# Altium PCB PCB1.PcbDoc
Units mil, origin at the board's own origin, x right, y up, seen from the top; angles counter-clockwise.
Board outline 2920 x 2335 mil, 2 copper layers (Top Layer, Bottom Layer); 13 components, 23 nets, 84 pads, 24 vias.
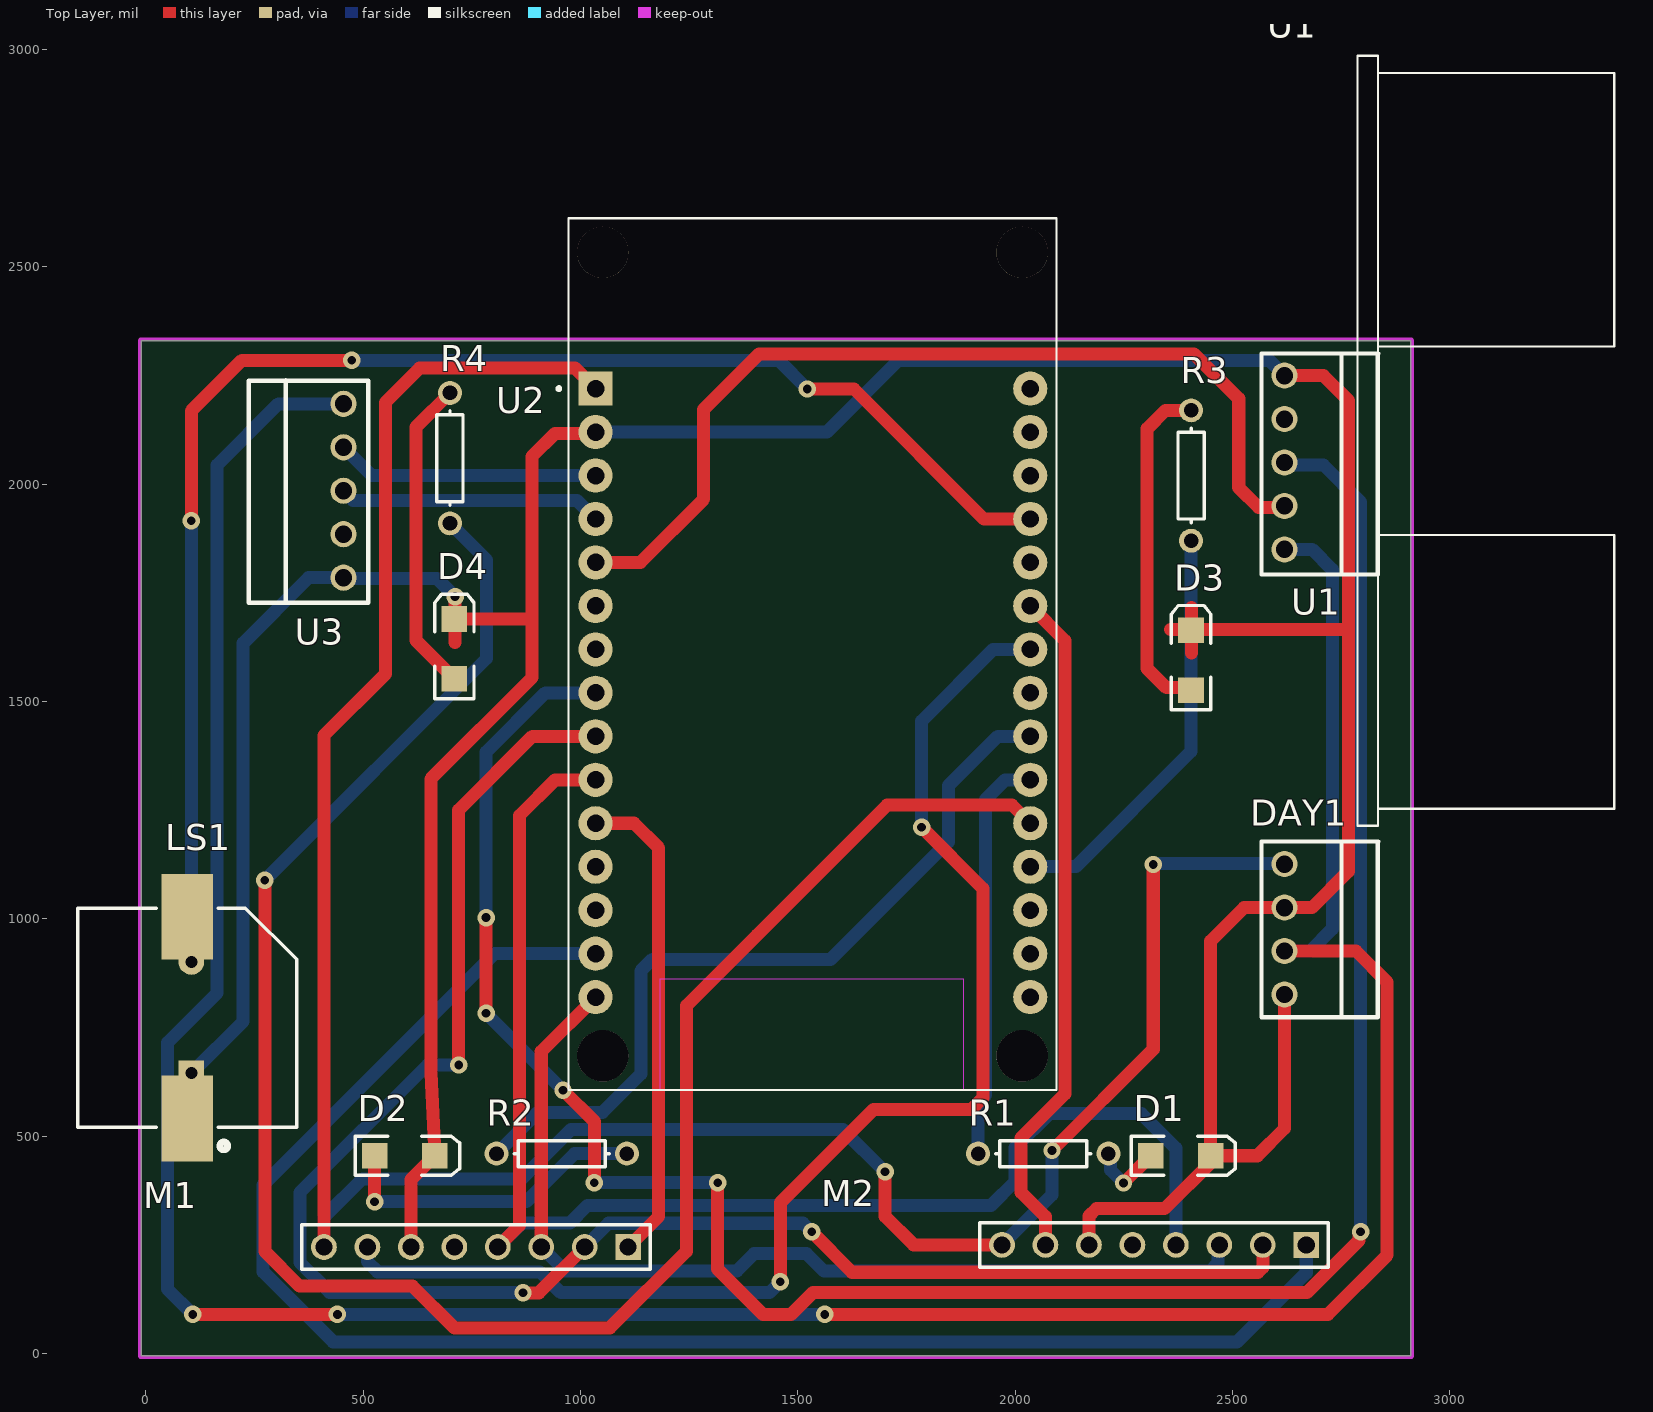
[diagram p0: Top Layer view]
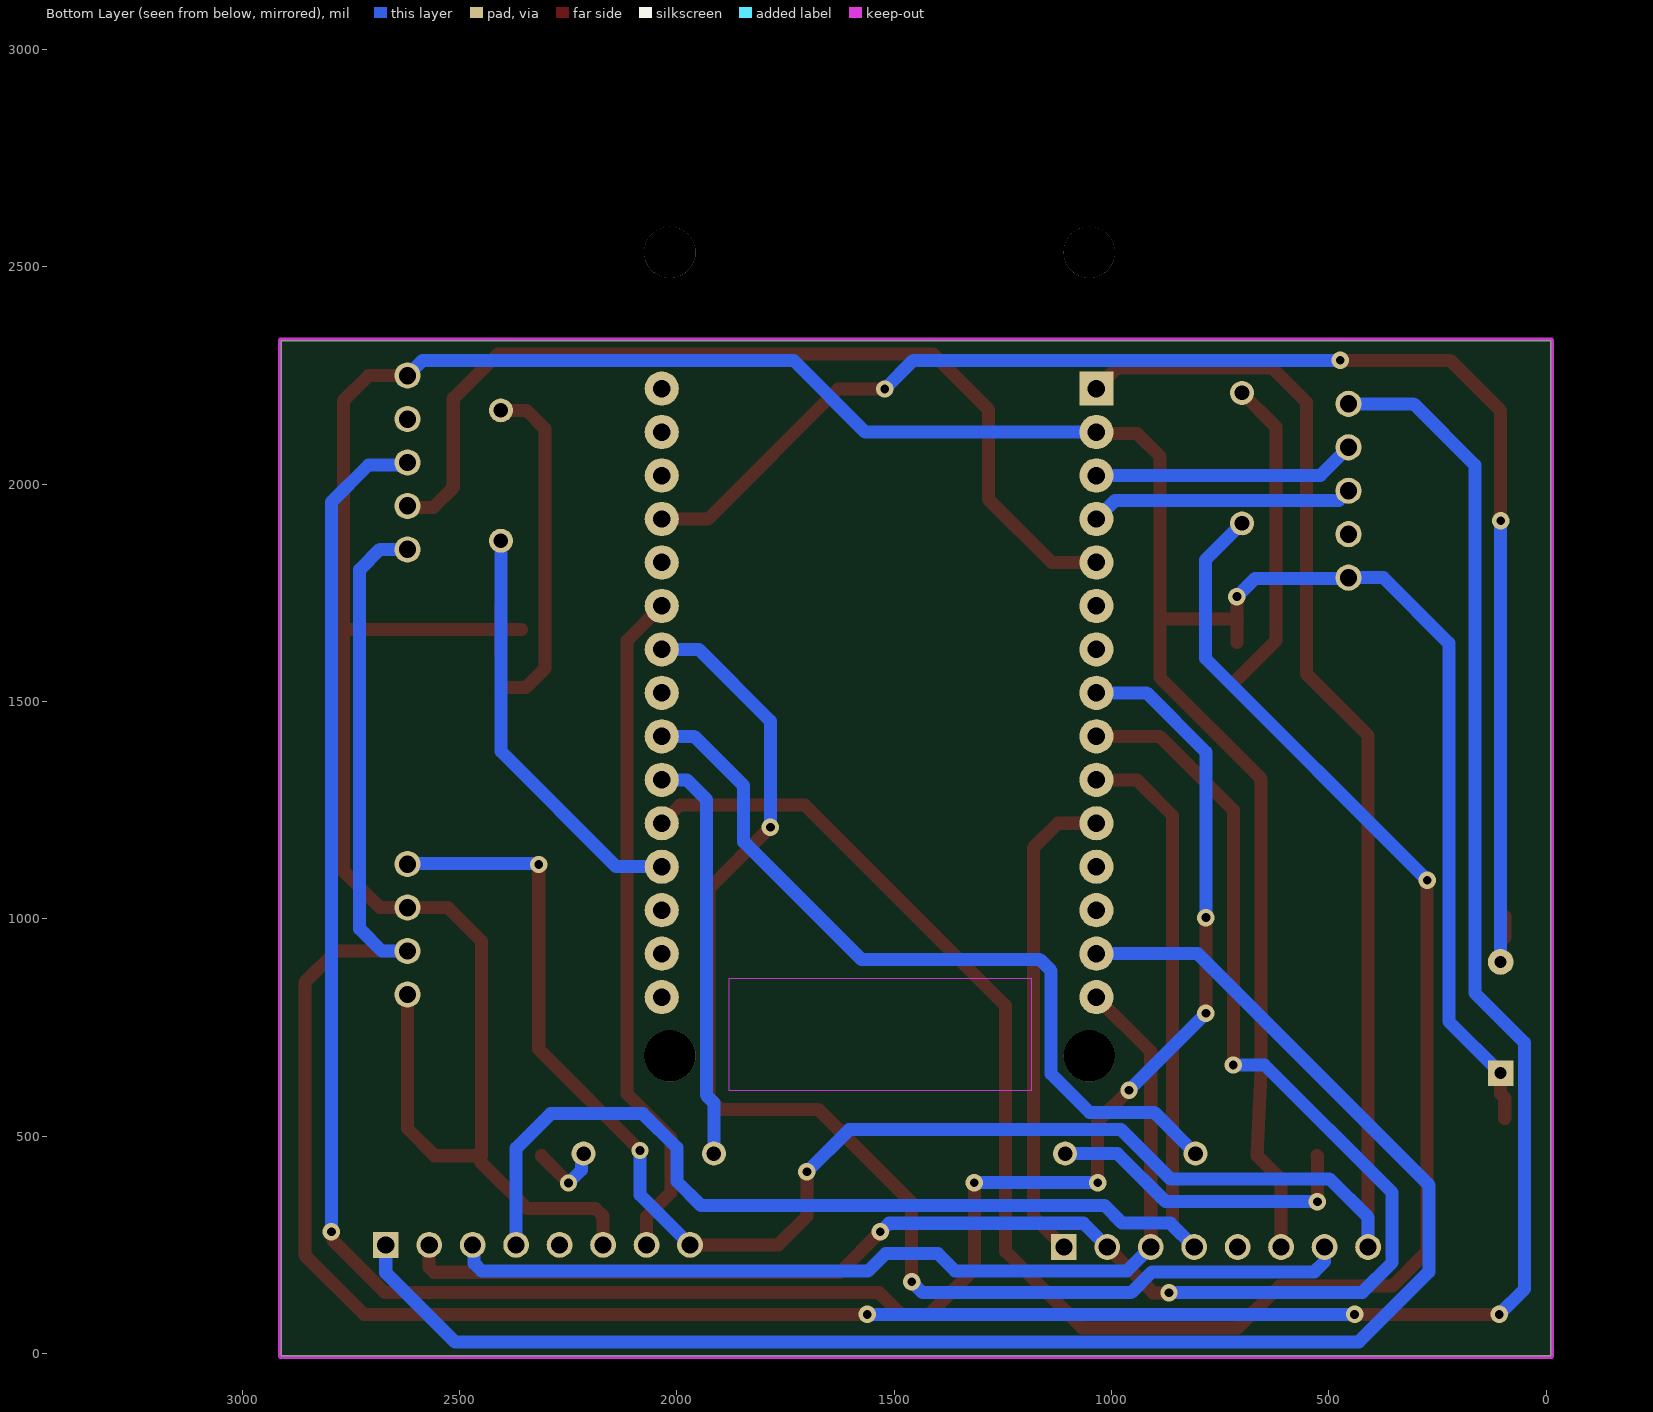
[diagram p1: Bottom Layer view, seen from below]

## Layer stack, top to bottom
Top Solder: solder mask 0.4, Solder Resist, Dk 3.5
Top Layer: signal copper 1.4
Dielectric 1: dielectric 12.6, FR-4, Dk 4.8
Bottom Layer: signal copper 1.4
Bottom Solder: solder mask 0.4, Solder Resist, Dk 3.5

## Board outline
-10,-5 2910,-5 2910,2330 -10,2330

## Design rules (kind name [scope] priority, off if disabled: settings)
Clearance [All] p1: gap=10 ignorepadtopadclearanceinfootprint=FALSE except(0: Arc-Hole Track-Hole SMDPad-Hole THPad-Hole Via-Hole Fill-Hole Poly-Hole Region-Hole Text-Hole; 30: Arc-Fill Arc-Poly Arc-Region Track-Fill Track-Poly Track-Region SMDPad-Fill SMDPad-Poly SMDPad-Region THPad-Fill THPad-Poly THPad-Region Via-Fill Via-Poly Via-Region Fill-Fill Fill-Poly Fill-Region Poly-Poly Poly-Region Region-Region)
PolygonConnect [All] p1: connectstyle=Relief reliefconductorwidth=10 reliefentries=4 polygonreliefangle="90 Angle" airgapwidth=10
RoutingVias [All] p1: holewidth=28 width=50 viastyle="Through Hole" minholewidth=28 minwidth=50 maxholewidth=28 maxwidth=50
SolderMaskExpansion [All] p1: expansion=4 istentingtop=FALSE
Width [All] p1: maxlimit=150 minlimit=28 preferedwidth=30
30 further rules are at their usual default settings.

## Components (designator, comment, footprint, x,y, rotation, side; value= is the part's Value field where it differs from the comment)
D1 "LED2" 3.2X1.6X1.1 2381.1,455 r0 top
D2 "LED2" 3.2X1.6X1.1 596.1,455 r0 top
D3 "LED2" 3.2X1.6X1.1 2405,1595 r90 top
D4 "LED2" 3.2X1.6X1.1 710,1621.1 r90 top
LS1 "Buzzer" ABSM-1574 95.55,540.67 r90 top
M1 "RFID-RC522" RFID-RC522 760,245 r180 top
M2 "RFID-RC522" RFID-RC522 2320,250 r180 top
R1 "Res1" AXIAL-0.3 2065,460 r0 top value=330
R2 "Res1" AXIAL-0.3 957,460 r0 top value=330
R3 "Res1" AXIAL-0.3 2405,2020 r90 top value=330
R4 "Res1" AXIAL-0.3 700,2060 r90 top value=330
U1 "HC-SR04" XCVR_HC-SR04 2620,2100 r90 top
U2 "ESP32-DEVKIT-V1" MODULE_ESP32_DEVKIT_V1 1535,1609.17 r0 top

## Footprints (in the part's own frame and the unit in brackets; to place one, negate y for a bottom-side part, rotate by r counter-clockwise, add the part's x,y. Pads: shape width x height; smd on the part's side, far side on the other; paste and mask are expansions set on the pad)
3.2X1.6X1.1 [mm] "SMT LED; 2 Flat Leads"
  rect 1.5x1.5 smd: 1(-1.75,0) 2(1.75,0)
  silkscreen extent -2.9,-1.15 3.2,1.15
ABSM-1574 [mm] "Magnetic Transducer Buzzer"
  rect 5x3 smd: 1(0,0) 2(11.8,0)
  rect 1.5x1.5 hole 0.7: 1A(2.65,-0.24)
  round 1.5 hole 0.7: 2A(9.15,-0.24)
  silkscreen extent -1.83,-6.4 12.3,6.4
AXIAL-0.3 [mm] "Axial Device, Thru-Hole; 2 Leads; 0.3 in Pin Spacing"
  round 1.4 hole 0.85: 1(-3.81,0) 2(3.81,0)
  silkscreen extent -2.77,-0.76 2.77,0.76
MODULE_ESP32_DEVKIT_V1 [mm]
  rect 2x2 / inner round 2 / far side rect 2x2 hole 1.02: 1(-12.7,15.515)
  round 2 hole 1.02: 2(-12.7,12.975) 3(-12.7,10.435) 4(-12.7,7.895) 5(-12.7,5.355) 6(-12.7,2.815) 7(-12.7,0.275) 8(-12.7,-2.265) 9(-12.7,-4.805) 10(-12.7,-7.345) 11(-12.7,-9.885) 12(-12.7,-12.425) 13(-12.7,-14.965) 14(-12.7,-17.505) 15(-12.7,-20.045) 16(12.7,-20.045) 17(12.7,-17.505) 18(12.7,-14.965) 19(12.7,-12.425) 20(12.7,-9.885) 21(12.7,-7.345) 22(12.7,-4.805) 23(12.7,-2.265) 24(12.7,0.275) 25(12.7,2.815) 26(12.7,5.355) 27(12.7,7.895) 28(12.7,10.435) 29(12.7,12.975) 30(12.7,15.515)
  round 3 hole 3 unplated: ""(-12.28,-23.475) ""(-12.28,23.475) ""(12.23,-23.475) ""(12.23,23.475)
  Keep-Out Layer region: 8.78,-25.475 -8.91,-25.475 -8.91,-18.985 8.78,-18.985
  Keep-Out Layer region: 8.78,-25.475 -8.91,-25.475 -8.91,-18.985 8.78,-18.985
  silkscreen extent -14.95,-25.48 14.23,25.48
RFID-RC522 [mm]
  rect 1.508x1.508 / inner round 1.508 / far side rect 1.508x1.508 hole 1: 1(-8.89,0)
  round 1.508 hole 1: 2(-6.35,0) 3(-3.81,0) 4(-1.27,0) 5(1.27,0) 6(3.81,0) 7(6.35,0) 8(8.89,0)
  silkscreen extent -10.19,-1.3 10.19,1.3
XCVR_HC-SR04 [mm]
  round 1.53 hole 1.02: 1(-3.81,0) 2(-1.27,0) 3(1.27,0) 4(3.81,0)
  silkscreen extent -22.5,-19.27 22.5,-4.27

## Part data
D1 D2 D3 D4: "Typical RED, GREEN, YELLOW, AMBER GaAs LED", LatestRevisionDate=17-Jul-2002, LatestRevisionNote="Re-released for DXP Platform.", PackageDescription="SM LED; 2 Flat Leads", PackageReference=3.2X1.6X1.1, PackageVersion=Feb-2002, Published=8-Jun-2000, Publisher="Altium Limited"
LS1: "Magnetic Transducer Buzzer", ComponentLink1Description="Manufacturer Link", ComponentLink1URL=http://www.megastar.com/linecard/buzzmode/index.php, DatasheetVersion=17-Dec-2003, LatestRevisionDate=17-Dec-2003, LatestRevisionNote="Schematic revised, PCB Footprint replaced.", PackageDescription="Magnetic Transducer Buzzer", PackageReference=ABSM-1574, Published=24-Mar-1999, Publisher="Altium Limited"
M1 M2: "Bá»™ cÃ´ng cá»¥ phÃ¡t triá»ƒn trong IC Ä‘áº§u Ä‘á»c/ghi tÃ­ch há»£p MFRC522 Ä‘á»ƒ liÃªn láº¡c khÃ´ng tiáº¿p xÃºc á»Ÿ táº§n sá»‘ 13,56 MHz.", Package=Package, Check_prices=https://www.snapeda.com/parts/RFID-RC522/Handson+Technology/view-part/?ref=eda, MF="Handson Technology", MP=RFID-RC522, SnapEDA_Link=https://www.snapeda.com/parts/RFID-RC522/Handson+Technology/view-part/?ref=snap
R1 R2 R3 R4: "Resistor", LatestRevisionDate=17-Jul-2002, LatestRevisionNote="Re-released for DXP Platform.", PackageDescription="Axial Device, Thru-Hole; 2 Leads; 0.3 in Pin Spacing", PackageReference=AXIAL-0.3, Published=8-Jun-2000, Publisher="Altium Limited"
U1: "Ultrasonic Sensor Module", Package=None, Availability=Unavailable, MP=HC-SR04, Price=None
U2: "Dual core, Wi-Fi: 2.4 GHz up to 150 Mbits/s,BLE (Bluetooth Low Energy) and legacy Bluetooth, 32 bits, Up to 240 MHz", Package=None, Availability="Not in stock", Check_prices=https://www.snapeda.com/parts/ESP32-DEVKIT-V1/Do+it/view-part/?ref=eda, MF="Do it", MP=ESP32-DEVKIT-V1, Price=None, SnapEDA_Link=https://www.snapeda.com/parts/ESP32-DEVKIT-V1/Do+it/view-part/?ref=snap

## Free pads (board coordinates)
  round 60.24 hole 40.16: 6(455,1785) 6(455,1885) 6(455,1985) 6(455,2085) 6(455,2185) 6(2620,826.06) 6(2620,926.06) 6(2620,1026.06) 6(2620,1126.06) 6(2620,1850)

## Via types
v1: diameter 40, hole 20, Top Layer to Bottom Layer, tented both sides, 24 vias

## Nets (pads, with @x,y where several pads share a name; then routed paths per layer and width w, separated by ;. In a path a pad name is that pad's centre, name@x,y a point inside that pad or via, vN(x,y) a via of type N, cw(c..) or ccw(c..) an arc to the next point about the centre after c; other vN are vias at no path point)
5V: pad.6@455,2185 pad.6@2620,926.06 pad.6@2620,1850 | length 7160.2
  Top Layer w30: v1(108,90) v1(441,90) ; v1(1562,90) 2720,90 2856.3,226.3 2856.3,854.33 2784.57,926.06 pad.6@2620,926.06
  Bottom Layer w30: v1(108,90) 50,148 50,715 164,829 164,2043.92 305.08,2185 pad.6@455,2185 ; v1(441,90) v1(1562,90) ; pad.6@2620,926.06 2679.02,926.06 2730,977.05 2730,1803.46 2683.46,1850 pad.6@2620,1850
Buzzer: LS1.2 LS1.2A U2.27 | length 3505.6
  Top Layer w30: LS1.2 95.55,957.45 105,948 LS1.2A ; v1(105,1916) 105,2168.98 221.02,2285 v1(474,2285) ; v1(1522,2219) 1629.43,2219 1928.43,1920 U2.27
  Bottom Layer w30: LS1.2A v1(105,1916) ; v1(474,2285) 1456,2285 v1(1522,2219)
Echo_1: pad.6@455,1985 U2.4 | length 606.9
  Bottom Layer w30: pad.6@455,1985 477,1963 992,1963 U2.4
Echo_2: U1.2 U2.8 | length 5387.2
  Top Layer w30: v1(783,783) v1(783,1003) ; v1(960,606) 1032,534 v1(1032,393) ; v1(1316,393) 1316,194 1420,90 1485,90 1535,140 2671.5,140 2791.17,259.68 2791.17,276.17 v1(2795,280)
  Bottom Layer w30: v1(783,783) v1(960,606) ; v1(783,1003) 783,1383.39 919.61,1520 U2.8 ; v1(1032,393) v1(1316,393) ; U1.2 2625.71,2044.29 2709.65,2044.29 2795,1958.94 v1(2795,280)
GND: D1.2 D2.2 D3.2 D4.2 LS1.1 LS1.1A M1.6 M2.6 pad.6@455,1785 pad.6@2620,826.06 pad.6@2620,1026.06 U1.4 U2.2 | length 9316.9
  Top Layer w30: LS1.1 95.55,588 105,597.45 LS1.1A ; M1.6 610,400 D2.2 656,646 656,1322.34 888.78,1555.12 888.78,2063.98 941.93,2117.13 1032.13,2117.13 U2.2 ; D4.2@710,1690.3 D4.2@711.74,1690.3 ; 711.74,1636.43 D4.2@711.74,1690.3 ; v1(711.74,1741.48) D4.2@711.74,1690.3 ; 884.84,1690.3 D4.2@711.74,1690.3 ; M2.6 2170,316.09 2187.57,333.66 2344.36,333.66 D1.2@2452.21,441.52 ; 2357.34,1665.4 D3.2@2406.13,1665.4 ; 2406.13,1611.62 D3.2@2406.13,1665.4 ; 2406.13,1716.67 D3.2@2406.13,1665.4 ; pad.6@2620,826.06 2620,517.64 2557.36,455 D1.2 2450,949.02 2527.05,1026.06 2620,1026.06 2683.54,1026.06 2766.73,1109.25 2766.73,2192.91 2709.65,2250 U1.4 ; 2762.8,1665.4 D3.2@2406.13,1665.4
  Bottom Layer w30: LS1.1A 224,764 224,1634.43 374.57,1785 455,1785 456.54,1783.46 669.75,1783.46 v1(711.74,1741.48) ; U2.2 1567,2120 1732,2285 2585,2285 U1.4
MISO: M1.4 M2.4 U2.10 | length 3210.8
  Top Layer w30: M1.4 860,295 860,1237.95 942.05,1320 U2.10
  Bottom Layer w30: M1.4 865,300 975.63,300 1015.31,339.69 1016.52,340.89 1945.22,340.89 2000,395.67 2000,473.43 2078.57,552 2290.52,552 2370,472.52 M2.4
MOSI: M1.3 M2.3 U2.15 | length 2290.5
  Top Layer w30: M1.3 910,695 U2.15
  Bottom Layer w30: M1.3 965,190 1360,190 1400,230 1520,230 1560,190 2449.23,190 2466.81,207.57 2466.81,246.81 M2.3
NetD1_1: D1.1 R1.2 | length 170.5
  Top Layer w30: v1(2249.6,392.4) D1.1
  Bottom Layer w30: R1.2 2219.81,455.19 2219.81,422.19 v1(2249.6,392.4)
NetD2_1: D2.1 R2.2 | length 732.4
  Top Layer w30: v1(526.5,349.25) 526.85,349.6 526.85,454.65 D2.1
  Bottom Layer w30: v1(526.5,349.25) 875.62,349.25 986.37,460 R2.2
NetD3_1: D3.1 R3.2 | length 791.9
  Top Layer w30: D3.1 2399.24,1531.86 2348.06,1531.86 2304.13,1575.79 2304.13,2127.95 2346.18,2170 R3.2
NetD4_1: D4.1 R4.2 | length 726.5
  Top Layer w30: R4.2 622.05,2132.05 622.05,1640.16 D4.1
RA: R2.1 U2.22 | length 1840.1
  Bottom Layer w30: R2.1 902.05,555.05 1051.05,555.05 1139.21,643.21 1139.21,880.37 1165.57,906.73 1575.98,906.73 1846.69,1177.44 1846.69,1306.33 1960.35,1420 U2.22
RST_1: M1.7 U2.24 | length 3023.1
  Top Layer w30: v1(1460,165) 1460,347 1674.22,561.22 1899.31,561.22 1926,587.91 1926,1070 v1(1785,1211)
  Bottom Layer w30: M1.7@515.62,239.38 M1.7 510,211.75 533.76,187.99 907.01,187.99 955,140 1435,140 v1(1460,165) ; v1(1785,1211) 1785,1455.28 1949.72,1620 U2.24
RST_2: M2.7 U2.25 | length 1568.4
  Top Layer w30: U2.25 2115,1640 2115,597.28 2013.78,496.06 2013.78,371.06 2070,314.84 M2.7
SCK: M1.2 M2.2 U2.9 | length 4033.7
  Top Layer w30: v1(719.98,663.88) 719.49,664.37 719.49,1250 889.49,1420 U2.9 ; v1(868.04,139.6) 904.6,139.6 M1.2 ; v1(1532,280) 1624.99,187.01 2559.06,187.01 2570,197.95 M2.2
  Bottom Layer w30: v1(719.98,663.88) 648.13,663.88 355,370.75 355,209 423.25,140.75 866.89,140.75 v1(868.04,139.6) ; M1.2 1064.69,299.69 1512.31,299.69 v1(1532,280)
SDA_1: M1.1 U2.11 | length 1116
  Top Layer w30: U2.11 1123.5,1220 1180.12,1163.39 1180.12,315.12 M1.1
SDA_2: M2.1 U2.14 | length 3782.3
  Bottom Layer w30: U2.14 802,920 270,388 270,188 431.24,26.76 2511.01,26.76 2670,185.75 M2.1
Trig_1: pad.6@455,2085 U2.3 | length 606.9
  Bottom Layer w30: pad.6@455,2085 520,2020 U2.3
Trig_2: U1.1 U2.5 | length 2162.3
  Top Layer w30: U2.5 1137.91,1820 1283.46,1965.55 1283.46,2172.24 1411.22,2300 2411.61,2300 2514.76,2196.85 2514.76,1992.13 2560.04,1946.85 U1.1@2611.22,1946.85
VAO: R1.1 U2.21 | length 943.4
  Bottom Layer w30: R1.1 1915,576.91 1932.44,594.35 1932.44,1274.96 1976.58,1319.1 2034.1,1319.1 U2.21
VCC: M1.8 M2.8 pad.6@2620,1126.06 U2.1 | length 5738.4
  Top Layer w30: M1.8 410,1421.81 551.18,1562.99 551.18,2188.18 630,2267 988,2267 U2.1 ; v1(1701,418) 1701,315.73 1766.73,250 M2.8 ; v1(2084.98,467.02) 2318,700.05 v1(2318,1125)
  Bottom Layer w30: M1.8 410,313.2 498.8,402 865,402 978.05,515.05 1603.95,515.05 v1(1701,418) ; M2.8 2084.98,364.98 v1(2084.98,467.02) ; v1@2318,1127.15 pad.6@2618.12,1127.15
XE1: R3.1 U2.19 | length 964.6
  Bottom Layer w30: U2.19 2139.69,1120 2405,1385.31 R3.1
XE2: R4.1 U2.20 | length 4601.5
  Top Layer w30: v1(274,1089) 274,235 353.57,155.43 613.57,155.43 709.94,59.06 1067.91,59.06 1244.21,235.35 1244.21,800.31 1406.5,962.6 1705.9,1262 1993,1262 U2.20
  Bottom Layer w30: v1(274,1089) 784,1599 784,1826 R4.1
pads on no net: M1.5 M2.5 U1.3 U2. U2.6 U2.7 U2.12 U2.13 U2.16 U2.17 U2.18 U2.23 U2.26 U2.28 U2.29 U2.30

## Keep-outs
Keep-Out Layer:
  lines w7.87: -13.94,-5 ccw(c-10,-5) -10,-8.94 ; -13.94,-5 ccw(c-10,-5) -10,-8.94 ; -13.94,-5 -13.94,2330 ; -13.94,2330 cw(c-10,2330) -10,2333.94 ; -13.94,2330 cw(c-10,2330) -10,2333.94 ; -10,-8.94 2910,-8.94 ; -10,2333.94 2910,2333.94 ; 2910,-8.94 ccw(c2910,-5) 2913.94,-5 ; 2910,-8.94 ccw(c2910,-5) 2913.94,-5 ; 2910,2333.94 cw(c2910,2330) 2913.94,2330 ; 2910,2333.94 cw(c2910,2330) 2913.94,2330 ; 2913.94,-5 2913.94,2330

## Silkscreen, mask and mechanical layers (free items; w line width, h text height)
Top Overlay:
  lines w10: 321.85,1730.32 321.85,2239.17 ; 2750.98,774.61 2750.98,1177.17 ; 2751.06,1793.31 2751.06,2299.91 ; 2834.73,2299.91 2834.73,1792.32 2567.01,1792.32 2567.01,2300.89 2835.71,2300.89 ; 237.2,1727.36 511.81,1727.36 511.81,2238.19 237.2,2238.19 237.2,1727.36 ; 2566.93,773.62 2566.93,1178.15 2835.63,1178.15 2834.65,1177.17 2834.65,773.62 2566.93,773.62
  text "U1" at 2635,1699.96 h60
  text "U3" at 342.68,1631.06 h60
  text "DAY1" at 2541.5,1213.74 h60